# Altium PCB PCB1.PcbDoc (part 1 of 2)
Units mm, origin at the board's own origin, x right, y up, seen from the top; angles counter-clockwise.
Board outline 73.56 x 14.27 mm, 2 copper layers (Top Layer, Bottom Layer); 32 components, 52 nets, 198 pads, 60 vias.
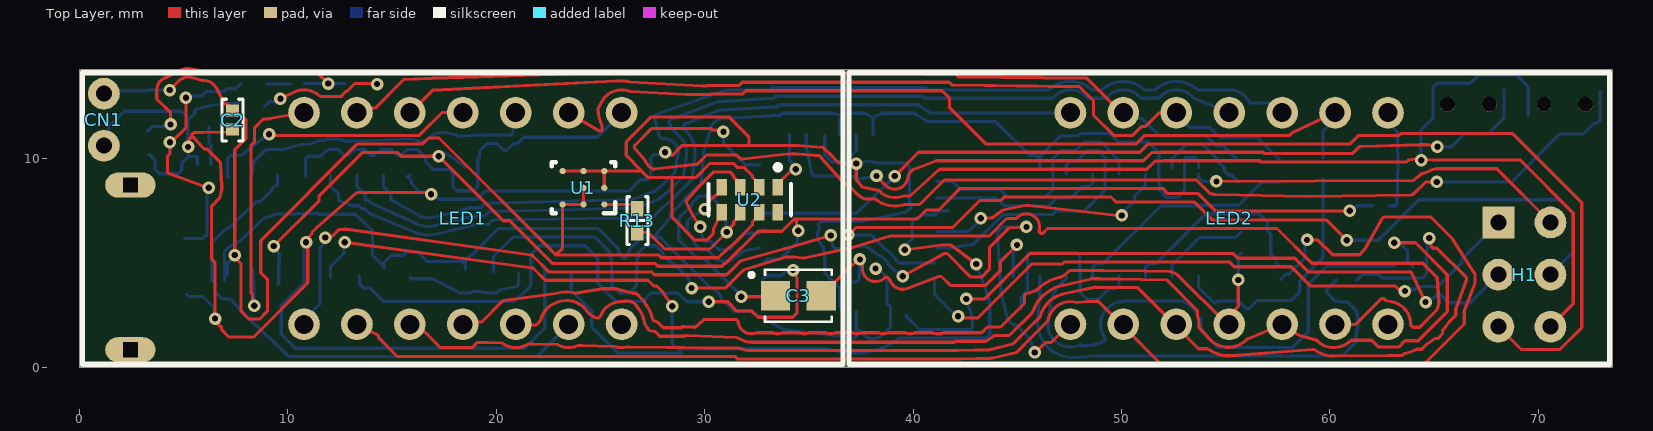
[diagram p0: Top Layer view]
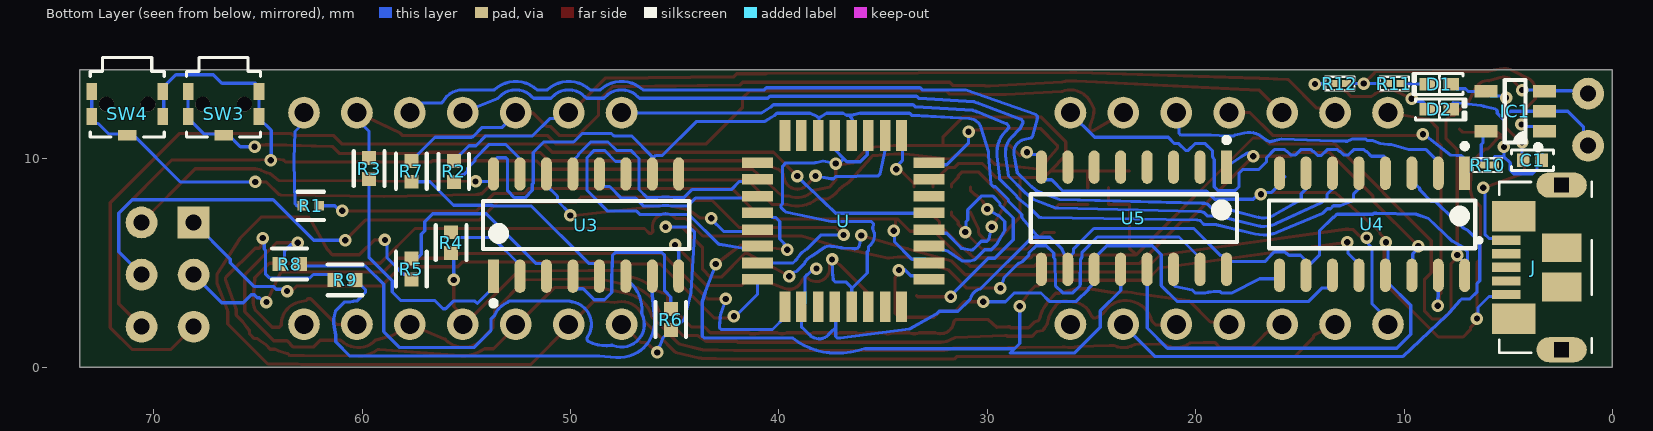
[diagram p1: Bottom Layer view, seen from below]

## Layer stack, top to bottom
Top Solder: solder mask 0.0102, Solder Resist, Dk 3.5
Top Layer: signal copper 0.0356
Dielectric 1: dielectric 0.32, FR-4, Dk 4.8
Bottom Layer: signal copper 0.0356
Bottom Solder: solder mask 0.0102, Solder Resist, Dk 3.5

## Board outline
0,0 73.558,0 73.558,14.275 0,14.275

## Design rules (kind name [scope] priority, off if disabled: settings)
Clearance [All] p1: gap=0.254 ignorepadtopadclearanceinfootprint=FALSE except(0: Arc-Hole Track-Hole SMDPad-Hole THPad-Hole Via-Hole Fill-Hole Poly-Hole Region-Hole Text-Hole; 0.127: SMDPad-Fill SMDPad-Poly SMDPad-Region)
PolygonConnect [All] p1: connectstyle=Relief reliefconductorwidth=0.254 reliefentries=4 polygonreliefangle="90 Angle" airgapwidth=0.254
RoutingVias [All] p1: holewidth=0.711 width=1.27 viastyle="Through Hole" minholewidth=0.711 minwidth=1.27 maxholewidth=0.711 maxwidth=1.27
SolderMaskExpansion [All] p1: expansion=0.102 istentingtop=FALSE
Width [All] p1: maxlimit=0.254 minlimit=0.127 preferedwidth=0.152 minimp=50.000000 maximp=50.000000 favimp=50.000000
30 further rules are at their usual default settings.

## Classes and differential pairs
component class RV-3028: C3 R13 U1 U2
component class Power_Management: C1 C2 CN1 D1 D2 IC1 J R10 R11 R12
component class Segment_Register: R2 R3 R4 R5 R6 R7 R8 R9 U3
component class Multiplex_Registers: R1 U4 U5
component class Micro: H1 SW3 SW4 U
component class LEDs: LED1 LED2

## Components (designator, comment, footprint, x,y, rotation, side; value= is the part's Value field where it differs from the comment)
C1 "10 µF" "CAP 0402_1005" 3.835,9.931 r0 bottom
C2 "10 µF" "CAP 0402_1005" 7.341,11.862 r90 top
C3 "CPX3225A752D" CAPCP3225X100N 34.493,3.429 r0 top
CN1 "JSTPH" LAZY-JST 1.168,13.132 r270 top
D1 "Red" "LED 0402_1005 RED" 8.306,13.589 r0 bottom
D2 "Green" "LED 0402_1005 GREEN" 8.306,12.37 r180 bottom
H1 "ISP Header" "ISP Header" 68.087,1.945 r0 top
IC1 "MCP73831T-5ACI/OT" "MICROCHIP SOT-23-5 OT" 4.667,12.282 r0 bottom
J "105164-0001" MOLEX_105164-0001 0.988,4.788 r90 bottom
LED1 "SLR0365CRA1BD/AFN-3651A" LED-SEG-TH_SLR0365CRA1BD-AFN-3651A 18.39,7.137 r0 top locked
LED2 "SLR0365CRA1BD/AFN-3651A" LED-SEG-TH_SLR0365CRA1BD-AFN-3651A 55.169,7.137 r0 top locked
R1 "CRCW04020000Z0ED" FP-CRCW0402-e3-IPC_C 62.459,7.747 r0 bottom
R2 "CRCW0402150RFKED" FP-CRCW0402-e3-IPC_A 55.601,9.398 r90 bottom
R3 "CRCW0402150RFKED" FP-CRCW0402-e3-IPC_A 59.665,9.531 r90 bottom
R4 "CRCW0402150RFKED" FP-CRCW0402-e3-IPC_A 55.728,5.975 r270 bottom
R5 "CRCW0402150RFKED" FP-CRCW0402-e3-IPC_A 57.633,4.705 r270 bottom
R6 "CRCW0402150RFKED" FP-CRCW0402-e3-IPC_A 45.187,2.286 r270 bottom
R7 "CRCW0402150RFKED" FP-CRCW0402-e3-IPC_A 57.633,9.404 r90 bottom
R8 "CRCW0402150RFKED" FP-CRCW0402-e3-IPC_A 63.475,4.953 r0 bottom
R9 "CRCW0402150RFKED" FP-CRCW0402-e3-IPC_A 60.813,4.191 r0 bottom
R10 "10 kOhms" "RES 0201_0603" 5.994,9.703 r0 bottom
R11 "150 Ohms" "RES 0201_0603" 10.465,13.614 r0 bottom
R12 "150 Ohms" "RES 0201_0603" 13.081,13.614 r0 bottom
R13 "3 kOhms" "RES 0402_1005" 26.772,7.036 r270 top
SW3 "SOU-242HNT" SOU-242HNT_MIT 66.65,12.624 r0 bottom
SW4 "SOU-242HNT" SOU-242HNT_MIT 71.272,12.624 r0 bottom
U "ATMEGA168PA-AU" QFP80P900X900X120-32N 36.911,7.009 r270 bottom
U1 "TPS826951SIPT" SIP0008A 24.181,8.611 r180 top
U2 "RV-3028-C7 32.768kHz 1ppm TA QC" FP-RV-3028-C7_32_768kHz_1-MFG 32.16,8.042 r180 top
U3 "74HC595D,118" FP-SOT109-1-IPC_C 49.251,6.82 r90 bottom
U4 "74HC595D,118" FP-SOT109-1-IPC_C 11.532,6.858 r270 bottom
U5 "74HC595D,118" FP-SOT109-1-IPC_C 22.962,7.15 r270 bottom

## Footprints (in the part's own frame and the unit in brackets; to place one, negate y for a bottom-side part, rotate by r counter-clockwise, add the part's x,y. Pads: shape width x height; smd on the part's side, far side on the other; paste and mask are expansions set on the pad)
"CAP 0402_1005" [mm] "Chip Capacitor, 2-Leads, Body 1.02x0.51mm, IPC Medium Density"
  rect 0.6x0.64 smd: 1(-0.44,0) 2(0.44,0)
  silkscreen extent -1,-0.5 1,0.5, body extent -0.5,-0.26 0.5,0.26, height 0.52
CAPCP3225X100N [mm]
  rect 1.4x1.4 smd: 1(-1.1,0) 2(1.1,0)
  silkscreen extent -2.35,-1.25 1.6,1.25, body extent -1.6,-1.25 1.6,1.25, height 1
FP-CRCW0402-e3-IPC_A [mm]
  rect 0.668x0.672 smd paste+0 mask+0: 1(-0.502,0) 2(0.502,0)
  silkscreen extent -0.84,-0.74 0.84,0.74, body extent -0.5,-0.25 0.5,0.25, height 0.4
FP-CRCW0402-e3-IPC_C [mm]
  rect 0.468x0.472 smd paste+0 mask+0: 1(-0.402,0) 2(0.402,0)
  silkscreen extent -0.64,-0.67 0.64,0.67, body extent -0.5,-0.25 0.5,0.25, height 0.4
FP-RV-3028-C7_32_768kHz_1-MFG [mm]
  rect 0.5x0.8 smd paste+0 mask+0: 1(-1.35,-0.6) 2(-0.45,-0.6) 3(0.45,-0.6) 4(1.35,-0.6) 5(1.35,0.6) 6(0.45,0.6) 7(-0.45,0.6) 8(-1.35,0.6)
  silkscreen extent -1.97,-1.67 1.97,0.75, body extent -1.7,-1.1 1.7,1.1, height 0.25
FP-SOT109-1-IPC_C [mm]
  rect 1.604x0.528 smd paste+0 mask+0: 1(-2.451,4.445)
  rrect100% 1.604x0.528 smd paste+0 mask+0: 2(-2.451,3.175) 3(-2.451,1.905) 4(-2.451,0.635) 5(-2.451,-0.635) 6(-2.451,-1.905) 7(-2.451,-3.175) 8(-2.451,-4.445) 9(2.451,-4.445) 10(2.451,-3.175) 11(2.451,-1.905) 12(2.451,-0.635) 13(2.451,0.635) 14(2.451,1.905) 15(2.451,3.175) 16(2.451,4.445)
  silkscreen extent -3.88,-4.95 1.15,4.95, body extent -3,-4.95 3,4.95, height 1.75
"ISP Header" [mil]
  rect 60x60 hole 30: 1(0,196.85)
  round 60 hole 30: 2(98.43,196.85) 3(0,98.43) 4(98.43,98.43) 5(0,0) 6(98.43,0)
LAZY-JST [mil]
  round 60 hole 30: 1(98.43,0) 2(0,0)
"LED 0402_1005 GREEN" [mm] "Chip Diode, 2-Leads, Body 1.00x0.50mm, IPC Medium Density"
  rect 0.75x0.6 smd: 1(-0.575,0) 2(0.575,0)
  silkscreen extent -1.14,-0.51 1.27,0.51, body extent -0.5,-0.25 0.5,0.25, height 0.21
"LED 0402_1005 RED" [mm] "Chip Diode, 2-Leads, Body 1.00x0.50mm, IPC Medium Density"
  rect 0.75x0.6 smd: 1(-0.575,0) 2(0.575,0)
  silkscreen extent -1.14,-0.51 1.27,0.51, body extent -0.5,-0.25 0.5,0.25, height 0.21
LED-SEG-TH_SLR0365CRA1BD-AFN-3651A [mil]
  round 60 hole 36: 1(-300,-200) 2(-200,-200) 3(-100,-200) 4(0,-200) 5(100,-200) 6(200,-200) 7(300,-200) 8(300,200) 9(200,200) 10(100,200) 11(0,200) 12(-100,200) 13(-200,200) 14(-300,200)
  silkscreen extent -719,-276 719,276
"MICROCHIP SOT-23-5 OT" [mm] "SOT23, 5-Leads, Body 2.90x2.70mm, Pitch 0.95mm, IPC Medium Density"
  rect 1.1x0.6 smd: 1(-1.4,0.95) 2(-1.4,0) 3(-1.4,-0.95) 4(1.4,-0.95) 5(1.4,0.95)
  silkscreen extent -1.22,-1.5 0.5,1.85, body extent -1.36,-1.45 1.36,1.45, height 1.19
MOLEX_105164-0001 [mm]
  rect 0.45x1.38 smd: 1(1.3,4.11) 2(0.65,4.11) 3(0,4.11) 4(-0.65,4.11) 5(-1.3,4.11)
  oval 1.208x2.416 hole 0.7 square: SH1(-3.95,1.45) SH6(3.95,1.45)
  rect 1.475x2.1 smd: SH2(-2.462,3.75) SH5(2.462,3.75)
  rect 1.375x1.9 smd: SH3(-0.937,1.45) SH4(0.937,1.45)
  silkscreen extent -4.1,0 4.1,5.5, body extent -4.1,-0.7 4.1,4.45, height 2.45
QFP80P900X900X120-32N [mil]
  rect 58x20 smd: 1(-162,110) 2(-162,79) 3(-162,47) 4(-162,16) 5(-162,-16) 6(-162,-47) 7(-162,-79) 8(-162,-110) 17(162,-110) 18(162,-79) 19(162,-47) 20(162,-16) 21(162,16) 22(162,47) 23(162,79) 24(162,110)
  rect 20x58 smd: 9(-110,-162) 10(-79,-162) 11(-47,-162) 12(-16,-162) 13(16,-162) 14(47,-162) 15(79,-162) 16(110,-162) 25(110,162) 26(79,162) 27(47,162) 28(16,162) 29(-16,162) 30(-47,162) 31(-79,162) 32(-110,162)
  body extent -177,-177 177,177, height 47
"RES 0201_0603" [mm] "Chip Resistor, 2-Leads, Body 0.60x0.30mm, IPC Medium Density"
  rect 0.44x0.35 smd: 1(-0.325,0) 2(0.325,0)
  silkscreen extent -0.7,-0.33 0.7,0.33, body extent -0.3,-0.15 0.3,0.15, height 0.21
"RES 0402_1005" [mm] "Chip Resistor, 2-Leads, Body 1.0x0.5mm, IPC Medium Density"
  rect 0.75x0.6 smd: 1(-0.575,0) 2(0.575,0)
  silkscreen extent -1.14,-0.51 1.14,0.51, body extent -0.5,-0.25 0.5,0.25, height 0.35
SIP0008A [mm]
  round 0.3 smd paste+0.02 mask+0.051: A1(-1,0.8) A2(0,0.8) A3(1,0.8) B1(-1,0) B2(0,0) C1(-1,-0.8) C2(0,-0.8) C3(1,-0.8)
  silkscreen extent -1.53,-1.22 1.53,1.22, body extent -1.45,-1.15 1.45,1.15, height 0.93
SOU-242HNT_MIT [mil]
  round 28 hole 28 unplated: 6(-39.35,0) 7(39.35,0)
  rect 20x32 smd paste+0 mask+0: A(-66.95,-23.6) B1(66.95,23.6) B2(66.95,-23.6) G(-66.95,23.6)
  rect 35x20 smd: B3(0,59.1)
  silkscreen extent -70,-88 70,62, body extent 0,0 10,10, height 10

## Part data
C1 C2: library part CL05A106MQ5NUNC, "CAP CER 10UF 6.3V X5R 0402", Device Package="0402 (1005 Metric)", manufacturer="Samsung Electro-Mechanics", Operating Temperature="-55°C ~ 85°C", Supplier Part Number 1=1276-1451-1-ND, Temperature Coefficient=X5R, Tolerance=±20%, Voltage - Rated=6.3V, Applications="General Purpose", Capacitance="10 µF", ComponentLink1Description=Datasheet, ComponentLink1URL=http://www.samsungsem.com/kr/support/product-search/mlcc/CL05A106MQ5NUNC.jsp, ComponentLink2Description="DigiKey Link", ComponentLink2URL=https://www.digikey.com/en/products/detail/samsung-electro-mechanics/CL05A106MQ5NUNC/3887109, lastupdated="7/26/2022 2:28:04 AM", Lifecycle Status=Active, Minimum Order=1, Mounting Type="Surface Mount, MLCC", Package / Case="0402 (1005 Metric)", Packaging=TapeAndReel, Part Number=CL05A106MQ5NUNC, Part Status=Active, partid=1766, price=0.03, Series=CL, Size / Dimension="0.039\" L x 0.020\" W (1.00mm x 0.50mm)", Supplier 1=DigiKey, Thickness (Max)="0.028\" (0.70mm)"
C3: "7.5mF (EDLC) Supercapacitor 2.6V 1210 (3225 Metric) 25Ohm @ 1kHz", Package="1210 Seiko", Availability=Good, Check_prices=https://www.snapeda.com/parts/CPX3225A752D/Seiko%20Instruments/view-part/2170187/?ref=eda, MF="Seiko Instruments", MP=CPX3225A752D, price=None, Purchase-URL=https://pricing.snapeda.com/search/part/CPX3225A752D/?ref=eda, SnapEDA_Link=https://www.snapeda.com/parts/CPX3225A752D/Seiko%20Instruments/view-part/2170187/?ref=snap
CN1: library part JST_2PIN, "JST 2-Pin Right-Angle Connector  PH-Series - 4UConnector: 17311  SH-Series - 4UConnector: 07278", DeviceSetName=JST_2PIN, GateName_1=G$1, LibraryName=microbuilder, SymbolName_1=PINHD2
D1: library part APHHS1005SURCK, "LED RED CLEAR CHIP SMD", Current - Test=20mA, Device Package="0402 (1005 Metric)", Lens Color=Colorless, manufacturer=Kingbright, Millicandela Rating=70mcd, Supplier Device Package="Chip LED", Supplier Part Number 1=754-1104-1-ND, Voltage - Forward (Vf) (Typ)=1.95V, Color=Red, ComponentLink1Description=Datasheet, ComponentLink1URL=http://www.kingbrightusa.com/images/catalog/SPEC/APHHS1005SURCK.pdf, ComponentLink2Description="DigiKey Link", ComponentLink2URL=https://www.digikey.com/en/products/detail/kingbright/APHHS1005SURCK/1747502, Configuration=Standard, Height (Max)=0.60mm, lastupdated="7/29/2022 2:39:04 PM", Lens Size="0.80mm x 0.50mm", Lens Style="Rectangle with Flat Top", Lens Transparency=Clear, Lifecycle Status=Active, Minimum Order=1, Mounting Type="Surface Mount", Package / Case="0402 (1005 Metric)", Packaging=TapeAndReel, Part Number=APHHS1005SURCK, Part Status=Active, partid=520, price=0.09, Series=-, Size / Dimension="1.00mm L x 0.50mm W", Supplier 1=DigiKey, Viewing Angle=120°, Wavelength - Dominant=630nm, Wavelength - Peak=645nm
D2: library part APHHS1005CGCK, "LED GREEN CLEAR CHIP SMD", Current - Test=20mA, Device Package="0402 (1005 Metric)", Lens Color=Colorless, manufacturer=Kingbright, Millicandela Rating=50mcd, Supplier Device Package="Chip LED", Supplier Part Number 1=754-1101-1-ND, Voltage - Forward (Vf) (Typ)=2.1V, Color=Green, ComponentLink1Description=Datasheet, ComponentLink1URL=http://www.kingbrightusa.com/images/catalog/SPEC/APHHS1005CGCK.pdf, ComponentLink2Description="DigiKey Link", ComponentLink2URL=https://www.digikey.com/en/products/detail/kingbright/APHHS1005CGCK/1747499, Configuration=Standard, Height (Max)=0.60mm, lastupdated="7/29/2022 2:38:46 PM", Lens Size="0.80mm x 0.50mm", Lens Style="Rectangle with Flat Top", Lens Transparency=Clear, Lifecycle Status=Active, Minimum Order=1, Mounting Type="Surface Mount", Package / Case="0402 (1005 Metric)", Packaging=TapeAndReel, Part Number=APHHS1005CGCK, Part Status=Active, partid=713, price=0.07, Series=-, Size / Dimension="1.00mm L x 0.50mm W", Supplier 1=DigiKey, Viewing Angle=120°, Wavelength - Dominant=570nm, Wavelength - Peak=574nm
IC1: "IC CONTRLR LI-ION 4.50V SOT23-5", Part Number=MCP73831T-5ACI/OT
J: "USB - micro B USB 2.0 Receptacle Connector 5 Position Surface Mount, Right Angle; Through Hole", Package=None, Availability=Unavailable, MF=Molex, MP=1051640001, price=None, SnapEDA_Link=https://www.snapeda.com/parts/1051640001/Molex/view-part/1758198/?ref=snap
LED1 LED2: BOM_JLCPCB Part Class="Extended Part", BOM_Manufacturer=SUNLIGHT, BOM_Manufacturer Part=SLR0365CRA1BD/AFN-3651A, BOM_Supplier=LCSC, BOM_Supplier Part=C225969, Contributor=LCSC, spicePre=L, spiceSymbolName=SLR0365CRA1BD/AFN-3651A
R1: library part CMP-2002-08122-2, "RES Thick Film, 0Ω, 0.063W, 0402", Case Code (Imperial)=0402, Case Code (Metric)=1005, Max Operating Temperature=155°C, Max Power Dissipation=63mW, Min Operating Temperature=-55°C, Package Quantity=1, Resistance=0mR, Temperature Coefficient=100ppm/°C, Tolerance=5%, Voltage Rating=50V, Case/Package=0402, Composition="Thick Film", Contact Plating=Tin, Depth=0.5mm, Features="Automotive AEC-Q200", Height=0.35mm, Lead Free="Lead Free", Length=1mm, Military Standard=Not, Mount="Surface Mount", Number of Terminations=2, Packaging="Tape and Reel", Power Rating=63mW, Radiation Hardening=No, Termination=SMD/SMT, Voltage Rating (DC)=50V, Weight=2.3E-05oz, Width=0.5mm
R2 R3 R4 R5 R6 R7 R8 R9: library part CMP-2002-08214-2, "RES Thick Film, 150Ω, 1%, 0.063W, 100ppm/°C, 0402", Case Code (Imperial)=0402, Case Code (Metric)=1005, Max Operating Temperature=155°C, Min Operating Temperature=-55°C, Package Quantity=10000, Power Rating=63mW, Resistance=150R, Temperature Coefficient=100ppm/°C, Tolerance=1%, Voltage Rating=50V, Case/Package=0402, Composition="Thick Film", Contact Plating=Tin, Depth=0.5mm, Height=0.35mm, Lead Free="Lead Free", Length=1mm, Military Standard=Not, Mount="Surface Mount", Packaging="Tape and Reel", Radiation Hardening=No, Termination=SMD/SMT, Voltage Rating (DC)=50V, Weight=2.3E-05oz, Width=0.5mm
R10: library part RC0201FR-0710KL, "RES 10K OHM 1% 1/20W 0201", Device Package="0201 (0603 Metric)", manufacturer=Yageo, Operating Temperature="-55°C ~ 125°C", Power (Watts)="0.05W, 1/20W", Supplier Device Package=0201, Supplier Part Number 1=311-10.0KMCT-ND, Temperature Coefficient=±200ppm/°C, Tolerance=±1%, ComponentLink1Description=Datasheet, ComponentLink1URL=https://www.yageo.com/upload/media/product/productsearch/datasheet/rchip/PYu-RC_Group_51_RoHS_L_10.pdf, ComponentLink2Description="DigiKey Link", ComponentLink2URL=https://www.digikey.com/en/products/detail/yageo/RC0201FR-0710KL/1948870, Composition="Thick Film", Features="Moisture Resistant", Height - Seated (Max)="0.010\" (0.26mm)", lastupdated="8/4/2022 4:39:11 AM", Lifecycle Status=Active, Minimum Order=1, Number of Terminations=2, Package / Case="0201 (0603 Metric)", Packaging=CutTape, Part Number=RC0201FR-0710KL, Part Status=Active, partid=2281, price=0.01, Resistance="10 kOhms", Series=RC_L, Size / Dimension="0.024\" L x 0.012\" W (0.60mm x 0.30mm)", Supplier 1=DigiKey
R11 R12: library part RC0201FR-07150RL, "RES 150 OHM 1% 1/20W 0201", Device Package="0201 (0603 Metric)", manufacturer=Yageo, Operating Temperature="-55°C ~ 125°C", Power (Watts)="0.05W, 1/20W", Supplier Device Package=0201, Supplier Part Number 1=YAG2273CT-ND, Temperature Coefficient=±200ppm/°C, Tolerance=±1%, ComponentLink1Description=Datasheet, ComponentLink1URL=https://www.yageo.com/upload/media/product/productsearch/datasheet/rchip/PYu-RC_Group_51_RoHS_L_10.pdf, ComponentLink2Description="DigiKey Link", ComponentLink2URL=https://www.digikey.com/en/products/detail/yageo/RC0201FR-07150RL/3202385, Composition="Thick Film", Features="Moisture Resistant", Height - Seated (Max)="0.010\" (0.26mm)", lastupdated="8/4/2022 4:39:17 AM", Lifecycle Status=Active, Minimum Order=1, Number of Terminations=2, Package / Case="0201 (0603 Metric)", Packaging=CutTape, Part Number=RC0201FR-07150RL, Part Status=Active, partid=1399, price=0.01, Resistance="150 Ohms", Series=RC_L, Size / Dimension="0.024\" L x 0.012\" W (0.60mm x 0.30mm)", Supplier 1=DigiKey
R13: library part RC0402FR-073KL, "RES 3K OHM 1% 1/16W 0402", Device Package="0402 (1005 Metric)", manufacturer=Yageo, Operating Temperature="-55°C ~ 155°C", Power (Watts)="0.063W, 1/16W", Supplier Device Package=0402, Supplier Part Number 1=311-3KLRCT-ND, Temperature Coefficient=±100ppm/°C, Tolerance=±1%, ComponentLink1Description=Datasheet, ComponentLink1URL=https://www.yageo.com/upload/media/product/productsearch/datasheet/rchip/PYu-RC_Group_51_RoHS_L_10.pdf, ComponentLink2Description="DigiKey Link", ComponentLink2URL=https://www.digikey.com/en/products/detail/yageo/RC0402FR-073KL/2827586, Composition="Thick Film", Features="Moisture Resistant", Height - Seated (Max)="0.016\" (0.40mm)", lastupdated="8/4/2022 4:45:37 AM", Lifecycle Status=Active, Minimum Order=1, Number of Terminations=2, Package / Case="0402 (1005 Metric)", Packaging=CutTape, Part Number=RC0402FR-073KL, Part Status=Active, partid=2489, price=0.01, Resistance="3 kOhms", Series=RC_L, Size / Dimension="0.039\" L x 0.020\" W (1.00mm x 0.50mm)", Supplier 1=DigiKey
SW3 SW4: "SWITCH TACTILE, SPST-NO, 0.05A 1", Mfr_Name=Mitsumi, Copyright="Copyright (C) 2022 Ultra Librarian. All rights reserved.", Digi-Key_Part_Number_1=12-SOU-242HNTTR-ND, Digi-Key_Part_Number_2=12-SOU-242HNTCT-ND, Digi-Key_Part_Number_3=12-SOU-242HNTDKR-ND, Manufacturer_Part_Number=SOU-242HNT, RefDes=RefDes, Supplier 1=Digi-Key, Supplier 2=Digi-Key, Supplier 3=Digi-Key, Type=DEV
U: "AVR AVRÂ® ATmega Microcontroller IC 8-Bit 20MHz 16KB _8K x 16_ FLASH 32-TQFP _7x7_", Package="TQFP-32 Microchip", Availability=Unavailable, MF=Microchip, MP=ATMEGA168PA-AU, price=None, SnapEDA_Link=https://www.snapeda.com/parts/ATMEGA168PA-AU/Microchip/view-part/1772950/?ref=snap
U1: "No Description Available", Mfr_Name="Texas Instruments", Copyright="Copyright (C) 2022 Ultra Librarian. All rights reserved.", Digi-Key_Part_Number_1=2156-TPS826951SIPT-ND, Digi-Key_Part_Number_2=296-TPS826951SIPTCT-ND, Digi-Key_Part_Number_3=296-TPS826951SIPTDKR-ND, Digi-Key_Part_Number_4=296-TPS826951SIPTTR-ND, Digi-Key_Part_Number_5=TPS826951SIPT-ND, Manufacturer_Part_Number=TPS826951SIPT, RefDes=RefDes, Type=DEV
U2: library part CMP-226158-000001-1, "Real Time Clock Serial 2byte Clock/Calendar/Alarm/Timer/Battery Backup 8-Pin CSMD T/R", Ambient Temperature Range High=+85°C, Ambient Temperature Range Low=-40°C, Frequency=32.768kHz, manufacturer="Micro Crystal", Max Supply Voltage=5.5V, Min Supply Voltage=1.1V, Nominal Supply Current=0.04uA, Temperature="-40°C to +85°C", Automotive=No, Category=IC, ComponentLink2Description=Datasheet, ComponentLink2URL=https://www.microcrystal.com/fileadmin/Media/Products/RTC/Datasheet/RV-3028-C7.pdf, Device Class L1="Integrated Circuits (ICs)", Device Class L2="Clock and Timing", Device Class L3="Real Time Clocks", Height=0.8mm, Interface=I2C, Lead Free=Yes, Manufacturer Part Number="RV-3028-C7 32.768kHz 1ppm TA QC", Memory Size=2Bytes, Mouser Description="RV-3028-C7 32.768KHZ 1PPM Ta Qc", Number Of Outputs=1, Octopart=https://octopart.com/rv-3028-c7+32.768khz+1ppm+ta+qc-micro+crystal-98880451, Package="RV-3028-C7 32.768kHz 1ppm TA QC", RoHS=TRUE, Temperature Range High=+85°C, Temperature Range Low=-40°C
U3 U4 U5: library part CMP-14351-000006-1, "IC SHIFT REGISTER 8BIT 16SOIC", RoHS Compliant=Yes

## Via types
v1: diameter 0.6, hole 0.3, Top Layer to Bottom Layer, 60 vias

## Nets (pads, with @x,y where several pads share a name; then routed paths per layer and width w, separated by ;. In a path a pad name is that pad's centre, name@x,y a point inside that pad or via, vN(x,y) a via of type N, cw(c..) or ccw(c..) an arc to the next point about the centre after c; other vN are vias at no path point)
GND: C1.1 C2.1 C3.2 CN1.1 D2.2 H1.6 IC1.2 J.5 R10.1 SW3.A SW3.G SW4.A SW4.G U1.B1 U1.C1 U1.C2 U1.C3 U2.2 U2.5 U3.8 U4.8 U4.13 U5.8 U5.13 U.3 U.5 U.21 | length 200.4
  Top Layer w0.152: v1(5.207,10.573) 5.25,10.94 5.407,11.096 5.407,11.103 ; 5.366,11.165 5.496,11.251 5.539,11.252 5.919,11.263 7.214,11.295 C2.1 ; 5.407,11.031 5.46,11.031 5.549,10.941 5.884,10.568 5.973,10.479 6.107,10.479 6.755,9.831 6.827,8.649 cw(c6.198,8.611) 6.805,8.442 6.71,8.102 6.335,7.727 6.335,5.176 6.502,5.008 v1(6.502,2.337) 6.502,2.216 6.816,1.903 6.816,1.795 7.163,1.448 8.349,1.448 10.953,4.052 10.953,5.912 v1(10.871,5.994) 10.871,6.116 11.155,6.4 11.155,6.484 11.371,6.699 11.373,6.699 13.264,8.345 13.307,8.382 16.789,8.382 v1(16.866,8.306) ; U1.C3 U1.C2 U1.C1 ; U1.B1 U1.C1 ; v1(28.094,10.31) 28.402,10.175 28.434,10.175 28.451,10.175 28.922,10.647 34.454,10.647 34.506,10.633 35.677,10.552 35.718,10.511 36.043,10.187 36.335,9.894 36.425,9.804 37.102,9.696 37.191,9.696 37.194,9.693 v1(37.275,9.774) ; U2.5 30.653,7.118 30.426,6.65 cw(c29.158,6.684) 30.424,6.62 cw(c29.158,6.684) 30.391,6.388 30.103,6.1 29.53,6.1 28.436,7.194 28.436,9.098 ; 32.131,10.668 32.131,11.042 31.158,12.015 27.432,12.015 26.23,10.812 26.23,10.165 26.984,9.411 ; U2.2 32.61,8.792 32.29,9.112 32.29,9.179 31.88,9.589 31.555,9.589 31.365,9.779 30.255,9.779 29.574,9.098 28.436,9.098 ; C3.2 36.965,4.801 37.054,4.89 v1@37.457,5.164 ; v1@37.275,9.612 37.275,8.999 37.559,8.646 38.301,8.49 38.348,8.48 ccw(c39.119,9.173) 39.52,8.217 39.852,8.217 41.267,9.5 51.215,9.5 51.565,9.85 51.608,9.893 51.668,9.895 52.03,9.906 52.035,9.906 56.626,9.906 56.677,9.855 63.684,9.855 63.727,9.898 63.76,9.931 63.806,9.94 64.221,10.019 64.301,10.019 v1(64.389,9.931) ; v1(37.447,5.171) 37.447,5.167 v1@37.453,5.161 ; v1@37.486,5.147 37.571,5.062 37.571,4.89 37.567,4.756 ccw(c38.197,4.737) 38.642,4.291 38.652,4.3 38.778,4.3 38.867,4.211 38.941,4.073 ccw(c39.497,4.369) 39.72,3.779 41.236,4.354 41.362,4.354 41.799,3.916 43.457,3.916 44.177,4.637 44.177,5.061 v1(44.983,5.867) ; v1@64.544,9.961 64.901,9.951 64.994,9.951 69.125,9.951 71.679,7.397 71.679,3.037 H1.6 ; U1.C1 26.984,9.411 ; 26.984,9.411 27.297,9.098 28.436,9.098
  Bottom Layer w0.152: CN1.1 1.381,10.844 1.381,11.515 2.148,12.282 IC1.2 4.893,12.282 4.937,12.243 5.122,12.075 5.208,11.887 5.187,11.866 5.187,10.78 5.197,10.77 5.207,10.77 v1(5.207,10.573) 5.207,10.116 ; C1.1@3.345,10.211 3.619,9.936 3.619,9.501 3.839,9.281 4.736,9.281 4.855,9.4 4.855,9.424 4.906,9.475 4.906,9.805 5.207,10.106 5.207,10.116 ; J.5@5.142,3.48 5.229,3.393 5.925,3.393 6.453,2.865 6.453,2.386 v1(6.502,2.337) ; 5.253,11.908 5.524,12.178 5.524,12.301 5.584,12.362 5.613,12.391 6.125,12.509 ccw(c5.983,13.123) 6.177,12.523 6.296,12.562 7.361,12.68 7.655,12.7 ; R10.1 5.644,9.728 5.644,10.109 5.214,10.109 5.207,10.116 ; v1@10.77,5.728 10.77,4.064 9.677,2.972 9.677,1.58 10.343,0.914 21.357,0.914 22.327,1.884 U5.13 ; U4.8@15.85,9.22 15.774,9.144 15.725,9.144 15.93,8.939 15.93,8.817 16.356,8.391 16.78,8.391 v1(16.866,8.306) 16.987,8.306 17.231,8.062 19.086,8.062 19.476,8.452 26.366,8.452 26.914,9 27.233,9 27.407,9.173 U5.8 27.407,10.037 27.58,10.211 v1@27.874,10.211 ; U.3@35.76,11.081 35.76,10.188 36.087,9.862 36.736,9.862 36.88,10.007 ; U.21 36.505,3.78 35.762,4.522 35.762,5.545 35.694,5.613 35.694,5.759 35.691,5.79 35.65,5.83 ccw(c35.542,5.723) 35.649,5.832 35.644,5.836 cw(c36.043,6.325) 35.499,6.644 35.499,6.683 35.499,6.708 35.465,6.807 35.465,6.896 35.51,6.94 35.555,6.985 35.618,6.985 37.506,6.985 39.685,7.452 39.774,7.542 39.891,7.658 39.891,7.785 39.819,7.856 39.819,9.652 39.669,9.803 38.474,9.803 cw(c38.447,11.637) 37.879,9.893 v1(37.275,9.774) ; 36.505,3.815 36.786,4.096 37.236,4.096 37.3,4.096 37.355,4.151 37.389,4.185 37.433,4.559 37.433,4.566 v1(37.447,5.171) ; v1@37.23,9.657 36.88,10.007 ; U.5@37.275,11.167 37.275,10.401 36.88,10.007 ; U3.8 44.806,5.568 44.983,5.746 v1(44.983,5.867) ; v1(64.389,9.931) 64.364,9.957 64.364,11.363 64.949,11.948 SW3.G SW3.A 64.949,13.452 65.127,13.63 66.731,13.63 67.137,14.036 68.937,14.036 69.521,13.452 SW4.G@69.521,12.101
NetC3_1: C3.1 R13.2 U2.6 | length 17.1
  Top Layer w0.152: R13.2 27.3,6.461 28.087,5.674 30.252,5.674 31.044,6.466 31.087,6.555 31.39,6.859 31.39,6.972 31.71,7.292 U2.6 ; v1(31.75,3.378) 33.342,3.378 C3.1
  Bottom Layer w0.152: v1(31.053,6.485) 31.013,6.524 31.013,6.994 30.937,7.07 30.937,7.55 30.267,8.22 29.745,8.22 29.388,7.863 29.388,7.772 29.294,7.679 29.273,7.679 28.754,7.159 28.754,6.117 29.642,5.23 29.949,5.23 31.75,3.429 v1(31.75,3.378)
NetD1_2: D1.2 R11.1 | length 1.2
  Bottom Layer w0.152: D1.2@8.982,13.589 R11.1@10.14,13.589
NetD2_1: D2.1 R12.2 | length 6.9
  Top Layer w0.152: v1(9.636,12.886) 10.272,13.19 cw(c10.77,12.217) 11.378,13.125 11.587,12.984 11.65,12.984 12.532,12.984 12.786,13.238 12.834,13.238 13.21,13.614 14.249,13.614 v1(14.275,13.589)
  Bottom Layer w0.152: D2.1@8.881,12.522 9.105,12.746 9.375,12.746 9.515,12.886 v1(9.636,12.886) ; R12.2 13.419,13.602 14.262,13.602 v1(14.275,13.589)
NetH1_1: H1.1 U.16 | length 31.1
  Top Layer w0.152: v1(42.155,2.44) 42.233,2.362 43.104,2.362 45.695,4.953 47.169,4.953 47.271,5.055 55.178,5.055 55.249,4.984 55.412,4.821 58.145,4.821 59.076,3.891 63.148,3.891 v1@63.352,3.687
  Bottom Layer w0.152: U.16 41.026,3.494 42.08,2.44 v1(42.155,2.44) ; v1(63.602,3.656) 63.687,3.742 64.12,3.742 64.258,3.88 65.196,3.88 66.327,5.011 66.327,5.185 H1.1
NetH1_3: H1.3 U.17 | length 33.5
  Top Layer w0.152: v1(42.545,3.277) 43.443,3.277 45.628,5.461 55.347,5.461 55.58,5.228 58.314,5.228 58.969,4.572 63.856,4.572 63.945,4.483 v1(64.592,3.124)
  Bottom Layer w0.152: U.17@39.675,2.493 39.675,2.443 40.307,1.81 42.703,1.81 42.766,1.81 42.855,1.899 42.855,1.975 42.817,2.416 ccw(c42.189,2.362) 42.749,2.653 v1(42.545,3.277) ; v1(64.592,3.124) 64.713,3.124 64.925,3.336 65.031,3.336 65.169,3.474 65.322,3.474 65.703,3.093 66.734,3.093 H1.3
NetH1_4: H1.4 U.15 | length 45.6
  Top Layer w0.152: v1(36.896,6.35) 37.27,6.706 41.91,6.706 43.205,8.001 44.198,8.001 44.371,8.174 49.49,8.174 49.496,8.168 49.739,7.925 53.507,7.925 54.371,7.061 59.843,7.061 v1(60.808,6.096)
  Bottom Layer w0.152: v1(36.896,6.35) 37.973,6.35 38.018,6.305 38.641,5.682 38.75,5.613 cw(c38.197,4.737) 39.073,5.29 39.142,5.181 39.32,5.003 U.15 ; v1(60.808,6.096) 62.329,6.096 64.271,8.037 71.039,8.037 71.679,7.397 71.679,5.537 H1.4
NetH1_5: H1.5 U.29 | length 53.2
  Top Layer w0.152: v1(39.119,9.173) 40.259,10.312 50.878,10.312 51.284,10.719 60.979,10.719 61.385,11.125 63.313,11.125 63.4,11.212 68.773,11.212 72.085,7.899 72.085,1.899 71.039,0.853 69.179,0.853 H1.5
  Bottom Layer w0.152: U.29@32.699,7.391 37.275,7.391 38.677,8.724 ccw(c38.243,9.181) 38.692,8.739 v1(39.119,9.173)
NetIC1_1: IC1.1 R11.2 R12.1 | length 14.1
  Top Layer w0.152: v1(4.367,11.652) 4.369,11.654 4.369,12.205 3.702,12.872 3.702,13.303 cw(c4.332,13.301) 4.047,13.863 4.748,14.22 cw(c5.218,13.296) 5.419,14.313 5.96,14.206 11.393,14.159 11.438,14.115 v1(11.938,13.614)
  Bottom Layer w0.152: IC1.1 3.491,11.556 4.15,11.556 4.246,11.652 v1(4.367,11.652) ; R11.2@10.764,13.64 10.934,13.614 v1(11.938,13.614) R12.1
NetIC1_5: IC1.5 R10.2 | length 1.9
  Bottom Layer w0.152: IC1.5@6.209,11.555 6.209,10.77 6.294,10.685 6.294,9.728 R10.2
NetLED1_1: LED1.1 LED2.1 R6.2 | length 52.7
  Top Layer w0.152: v1@11.919,6.09 12.384,6.555 12.429,6.599 12.666,6.622 cw(c12.725,5.994) 12.729,6.625 cw(c12.725,5.994) 12.813,6.619 21.673,5.378 21.724,5.371 21.76,5.335 22.518,4.577 27.445,4.577 27.582,4.44 31.049,4.44 31.702,5.093 33.804,5.681 cw(c34.083,4.683) 33.885,5.7 v1(36.043,6.325) ; v1(39.497,4.369) 41.502,5.461 41.628,5.461 42.767,4.323 43.289,4.323 43.658,4.692 43.658,5.737 44.607,6.686 v1(45.441,6.731) ; v1(45.842,0.708) 46.201,1.026 46.29,1.115 46.359,1.184 46.624,1.184 LED2.1@47.473,2.032
  Bottom Layer w0.152: LED1.1@10.77,2.032 10.77,2.27 11.532,3.032 11.532,5.719 11.7,5.888 11.7,6.137 v1(11.786,6.223) ; v1(36.043,6.325) 36.159,5.778 36.214,5.723 36.244,5.692 36.35,5.686 36.359,5.686 36.37,5.686 cw(c36.464,5.063) 36.485,5.693 36.937,5.721 ccw(c36.896,6.35) 37.011,5.73 37.331,5.79 cw(c37.447,5.171) 37.373,5.796 cw(c37.447,5.171) 37.39,5.798 37.494,5.808 cw(c37.567,5.182) 37.795,5.769 38.409,5.335 38.477,5.301 cw(c38.197,4.737) 38.784,4.964 38.806,4.942 39.152,4.596 39.271,4.56 v1(39.497,4.369) ; v1(45.441,6.731) 44.298,6.731 44.088,6.522 44.044,6.477 44.044,6.351 44.211,3.585 44.52,2.317 44.796,2.042 44.859,2.042 44.929,2.042 R6.2 45.189,1.784 45.473,1.499 45.562,1.41 45.713,1.038 45.756,0.995 45.756,0.794 v1(45.842,0.708)
NetLED1_2: LED1.2 LED2.2 R5.2 | length 72.7
  Top Layer w0.152: LED1.2@13.31,2.032 14.264,1.577 14.351,1.491 14.351,1.411 15.254,0.508 31.471,0.508 31.59,0.389 42.285,0.389 43.718,0.433 43.842,0.438 44.954,0.711 44.991,0.748 45.718,1.476 46.436,2.194 46.47,2.228 cw(c47.549,2.057) 47.731,3.134 47.894,3.107 cw(c48.88,-5.198) 48.816,3.165 48.88,3.165 48.924,3.12 50.038,2.007 51.918,0.127 62.935,0.127 63.077,0.15 63.102,0.152 64.522,0.152 66.446,2.076 66.446,2.673 66.457,2.727 66.963,4.039 66.963,4.462 65.862,6.182 64.83,7.214 62.592,7.214 62.503,7.124 61.657,5.637 61.632,5.604 61.426,5.398 60.202,5.398 60.141,5.398 60.097,5.44 59.387,6.119 v1(58.903,6.108)
  Bottom Layer w0.152: R5.2 57.89,4.461 58.023,4.461 58.807,5.244 58.807,6.012 v1(58.903,6.108)
NetLED1_3: LED1.3 LED2.3 R9.2 | length 64.2
  Top Layer w0.152: LED1.3@15.85,2.032 16.497,1.748 16.704,1.556 16.793,1.467 17.32,0.94 18.842,0.94 19.091,1.189 19.62,1.189 19.625,1.189 20.26,1.169 20.261,1.168 ccw(c20.93,2.032) 21.53,1.12 21.787,1.12 22.892,1.084 22.928,1.083 ccw(c23.47,2.032) 23.937,1.045 24.134,1.045 25.643,0.997 25.663,0.996 25.665,0.996 ccw(c26.01,2.032) 26.275,0.973 26.391,0.973 31.639,0.914 31.78,0.868 ccw(c32.233,2.238) 31.902,0.833 32.064,0.795 42.146,0.795 42.151,0.795 43.668,0.84 44.785,1.118 44.822,1.155 45.55,1.882 46.023,2.356 46.068,2.401 46.097,2.429 cw(c47.549,2.057) 47.277,3.531 48.721,3.835 48.785,3.835 50.775,3.81 52.553,2.032 53.696,0.889 54.123,0.889 54.265,0.799 ccw(c55.129,2.159) 55.253,0.552 59.18,0.856 cw(c59.192,0.704) 59.192,0.856 59.243,0.856 ccw(c60.173,2.032) 60.185,0.533 62.796,0.559 62.797,0.559 63.465,0.559 63.554,0.648 ccw(c62.767,4.081) 64.201,0.864 64.405,0.864 64.638,1.097 ccw(c62.767,4.081) 65.018,1.372 65.167,1.372 65.405,1.61 65.405,1.747 ccw(c62.767,4.081) 65.751,2.209 66.04,2.499 66.04,2.78 ccw(c62.767,4.081) 66.079,2.883 ccw(c62.767,4.081) 66.08,2.885 66.557,4.203 66.557,4.293 66.512,4.338 65.137,5.713 64.945,5.713 64.855,5.802 64.855,6.115 v1(64.77,6.2)
  Bottom Layer w0.152: R9.2 61.316,4.193 61.573,4.451 62.337,4.451 62.502,4.287 64.448,4.287 64.641,4.48 64.641,5.619 64.694,5.672 64.694,6.124 v1(64.77,6.2)
NetLED1_4: LED1.4 LED2.4 R4.2 | length 44.8
  Top Layer w0.152: LED1.4@18.39,2.032 18.529,2.171 19.291,2.171 20.306,3.186 22.843,3.531 cw(c23.368,1.9) 23.275,3.61 cw(c23.362,2.003) 23.798,3.553 25.096,3.764 25.728,3.764 26.508,3.554 26.548,3.549 26.711,3.549 27.04,3.22 27.077,3.183 27.101,3.124 27.206,2.972 cw(c25.58,1.85) 27.358,2.711 cw(c26.01,2.057) 27.456,2.449 cw(c26.01,2.057) 27.457,2.447 27.495,2.307 27.535,2.259 27.541,2.254 cw(c24.199,-2.409) 27.59,2.218 27.667,2.189 27.72,2.169 27.752,2.158 27.776,2.134 28.015,1.895 28.873,1.895 28.876,1.898 28.921,1.942 28.99,1.942 29.546,1.919 29.947,2.286 31.514,2.286 31.603,2.197 31.607,2.163 ccw(c32.233,2.238) 32.377,1.625 32.489,1.651 33.273,1.651 ccw(c33.503,2.238) 33.732,1.651 34.543,1.651 ccw(c34.773,2.238) 35.002,1.651 35.813,1.651 ccw(c36.043,2.238) 36.272,1.651 37.083,1.651 ccw(c37.313,2.238) 37.542,1.651 38.353,1.651 ccw(c38.583,2.238) 38.812,1.651 39.623,1.651 ccw(c39.853,2.238) 40.082,1.651 40.893,1.651 ccw(c41.123,2.238) 41.123,1.608 41.384,1.608 41.428,1.652 43.285,1.652 43.563,1.93 44.196,1.93 45.344,3.079 45.344,3.497 ccw(c43.818,9.037) 45.876,3.671 ccw(c45.821,3.813) 45.927,3.704 cw(c47.549,2.057) 47.081,4.321 ccw(c47.049,4.47) 47.136,4.345 ccw(c43.818,9.037) 47.528,4.648 49.121,4.648 51.113,4.623 52.34,4.597 52.37,4.584 52.68,4.445 55.093,2.032 55.093,2.403 55.601,2.911 v1(55.601,4.191)
  Bottom Layer w0.152: v1(55.601,4.191) 55.601,5.346 R4.2
NetLED1_5: LED1.5 LED2.5 R8.2 | length 57.8
  Top Layer w0.152: LED1.5@20.93,2.032 21.925,2.032 22.097,2.204 22.158,2.392 ; 22.158,2.393 22.16,2.398 cw(c23.368,1.9) 23.296,3.205 cw(c23.362,2.003) 24.159,2.904 ; 24.163,2.901 cw(c23.47,2.057) 24.368,2.678 ; 24.369,2.677 ccw(c25.012,3.122) 24.813,2.366 ccw(c24.852,2.514) 24.993,2.457 cw(c26.01,2.057) 26.07,3.148 ccw(c26.077,3.3) 26.117,3.153 cw(c26.278,2.58) 26.264,3.175 cw(c26.277,2.612) 26.777,2.87 ccw(c26.912,2.94) 26.794,2.844 cw(c25.58,1.85) 26.993,2.533 cw(c26.01,2.057) 27.087,2.234 27.104,2.134 27.123,2.08 27.265,1.866 cw(c25.995,1.855) 27.265,1.841 27.309,1.797 27.354,1.758 27.591,1.708 27.636,1.699 27.668,1.667 27.846,1.489 28.979,1.489 29.042,1.489 29.083,1.527 29.15,1.527 31.538,1.419 31.793,1.299 ccw(c32.233,2.238) 32.233,1.201 40.954,1.201 41.978,1.201 42.023,1.246 43.453,1.246 43.5,1.246 43.539,1.272 43.913,1.524 44.617,1.524 44.662,1.569 45.711,2.618 45.736,2.643 cw(c47.549,2.057) 47.186,3.928 ccw(c47.11,4.327) 47.201,3.931 48.552,4.242 48.953,4.242 50.945,4.216 52.172,4.191 53.645,2.718 53.645,2.486 53.645,2.458 cw(c52.629,2.057) 53.718,1.982 53.718,1.977 ; 53.718,1.977 53.718,1.918 53.758,1.874 54.239,1.348 ccw(c55.129,2.159) 56,1.326 cw(c56.108,1.219) 56.048,1.359 57.633,2.032 57.681,2.006 58.556,1.529 59.366,1.295 ccw(c60.173,2.032) 60.551,1.008 60.564,1.012 ccw(c60.249,2.057) 61.021,1.285 61.031,1.295 62.006,1.295 62.336,0.965 63.297,0.965 63.602,1.27 64.237,1.27 65.634,2.667 65.634,4.445 64.11,5.969 v1(63.094,5.969)
  Bottom Layer w0.152: v1(63.094,5.969) 63.179,5.883 63.433,5.883 63.719,5.598 63.719,5.084 R8.2@63.977,4.826
NetLED1_6: LED1.6 U4.3 | length 26.1
  Bottom Layer w0.152: U4.3@9.5,9.22 9.5,8.745 9.453,8.699 9.363,8.699 9.246,8.581 9.246,8.509 8.687,7.951 8.686,7.95 8.492,7.95 8.439,7.897 8.433,7.897 8.255,7.719 7.194,6.708 6.956,6.571 6.934,6.559 6.901,6.533 6.365,5.998 6.365,4.15 6.492,4.023 6.492,3.623 6.84,3.275 7.241,3.275 7.33,3.185 7.803,2.637 ccw(c8.28,3.048) 7.843,2.595 7.937,2.5 ccw(c8.382,2.946) 7.95,2.487 10.069,0.508 10.071,0.508 21.946,0.508 LED1.6@23.47,2.032
NetLED1_8: LED1.8 U4.4 | length 20.9
  Bottom Layer w0.152: U4.4@10.841,9.145 10.841,9.996 10.972,10.126 11.567,10.126 11.793,10.352 11.831,10.352 11.92,10.441 12.413,10.441 12.665,10.189 12.901,10.189 13.063,10.352 13.101,10.352 13.19,10.441 13.683,10.441 13.964,10.16 14.141,10.16 14.333,10.352 14.371,10.352 14.46,10.441 14.953,10.441 15.205,10.189 15.441,10.189 15.603,10.352 15.641,10.352 15.73,10.441 16.223,10.441 16.603,10.061 16.603,9.86 16.972,9.49 17.739,9.49 17.922,9.307 17.922,8.662 17.966,8.619 18.116,8.468 18.917,8.468 19.111,8.662 19.111,9.961 19.192,10.105 19.192,10.385 19.54,10.733 20.033,10.733 20.358,10.407 20.485,10.407 20.81,10.733 21.013,10.733 21.312,11.032 24.85,11.032 LED1.8@26.01,12.192
NetLED1_9: LED1.9 LED2.9 R3.2 | length 42.9
  Top Layer w0.152: LED1.9@23.47,12.192 24.903,11.362 ccw(c24.979,11.494) 25.061,11.366 25.077,11.455 25.077,11.582 24.995,11.788 cw(c26.484,12.381) 24.881,12.384 ccw(c24.729,12.385) 24.881,12.39 24.881,12.402 25.033,12.706 cw(c26.01,12.217) 26.014,13.31 cw(c26.01,12.217) 26.402,13.237 26.425,13.235 29.097,13.081 30.261,13.081 30.286,13.106 31.81,13.106 31.972,13.268 41.384,13.268 41.753,12.899 41.753,12.446 43.48,10.719 50.71,10.719 51.116,11.125 58.072,11.125 58.177,11.231 LED2.9
  Bottom Layer w0.152: R3.2 59.665,11.313 60.173,11.821 LED2.9@60.173,12.192
NetLED1_10: LED1.10 U4.2 | length 15
  Bottom Layer w0.152: U4.2@8.23,8.925 8.357,9.847 8.357,9.858 8.94,10.441 9.743,10.441 9.786,10.448 10.62,10.693 10.77,10.693 ccw(c10.77,12.192) 11.502,10.884 11.773,10.884 11.836,10.947 12.475,10.947 12.708,10.845 12.803,10.845 14.034,10.872 15.887,10.947 16.447,10.817 ccw(c15.85,12.192) 16.814,11.045 16.816,11.047 cw(c17.437,10.308) 17.669,11.245 18.089,11.141 18.13,11.131 18.16,11.101 18.161,11.1 18.438,11.1 18.456,11.102 19.268,11.14 19.372,11.14 20.709,11.14 20.798,11.229 20.798,12.061 LED1.10@20.93,12.192
NetLED1_11: LED1.11 U4.1 | length 12.9
  Top Layer w0.152: v1(9.093,11.176) 9.144,11.125 16.302,11.125 17.394,12.217 LED1.11
  Bottom Layer w0.152: U4.1@7.105,9.098 7.105,10.024 7.194,10.113 7.239,10.147 7.757,10.177 v1@8.927,11.089
NetLED1_12: LED1.12 LED2.12 R7.2 | length 45.2
  Top Layer w0.152: LED1.12@15.85,12.192 16.946,13.289 25.717,13.74 cw(c25.785,12.43) 25.833,13.741 25.942,13.74 cw(c26.01,12.243) 26.399,13.69 29.881,13.487 30.093,13.487 30.118,13.513 31.641,13.513 31.803,13.675 41.733,13.675 41.87,13.538 47.984,13.459 48.654,12.789 48.654,12.096 49.624,11.125 50.541,11.125 50.973,11.557 51.156,11.557 51.791,12.192 LED2.12@52.553,12.192
  Bottom Layer w0.152: LED2.12@52.553,12.192 52.586,12.192 53.27,11.508 54.232,11.508 54.678,11.062 54.725,11.062 54.75,11.036 56.5,11.036 57.63,9.906 R7.2
NetLED1_13: LED1.13 LED2.13 R2.2 | length 44.7
  Top Layer w0.152: LED1.13@13.31,12.192 13.553,12.435 14.188,12.435 15.518,13.765 15.56,13.807 15.619,13.81 16.944,13.868 25.73,14.147 cw(c25.785,12.43) 25.794,14.148 25.952,14.147 cw(c26.01,12.243) 26.018,14.148 40.599,14.096 40.615,14.081 42.019,14.081 42.158,13.942 48.336,13.868 LED2.13@50.013,12.192
  Bottom Layer w0.152: LED2.13@50.013,12.192 50.275,11.93 50.995,11.93 51.825,11.1 53.005,11.1 53.007,11.102 54.064,11.102 54.535,10.63 54.869,10.63 55.598,9.9 R2.2
NetLED1_14: LED1.14 U4.15 | length 13.1
  Top Layer w0.152: v1(8.382,2.946) 8.306,3.023 8.306,3.475 8.23,3.551 8.23,10.649 8.397,10.817 8.397,11.5 8.78,11.883 8.806,11.909 9.041,11.918 ccw(c9.017,12.548) 9.127,11.927 LED1.14
  Bottom Layer w0.152: U4.15@8.293,4.761 8.357,3.869 8.357,3.743 v1(8.382,2.946)
NetLED2_6: LED2.6 U5.15 | length 62
  Top Layer w0.152: v1(29.369,3.798) 30.982,3.798 31.843,4.659 33.899,5.286 34.221,5.294 cw(c34.237,4.664) 34.312,5.29 34.686,5.245 ccw(c34.761,5.871) 34.797,5.242 37.032,5.735 ccw(c36.896,6.35) 37.079,5.747 38.904,6.299 43.645,6.299 44.484,7.137 44.956,7.137 44.99,7.172 cw(c45.441,6.731) 46.053,6.582 46.053,6.564 46.053,6.501 46.097,6.457 46.142,6.412 46.205,6.412 46.448,6.654 57.462,6.654 59.124,4.992 64.452,4.992 64.91,4.534 65.15,4.294 65.221,3.164 cw(c64.592,3.124) 65.18,2.896 65.111,2.719 64.309,1.917 63.97,1.917 63.926,1.962 63.881,2.007 63.881,2.06 ccw(c62.789,2.057) 63.013,3.126 ; LED2.6 61.244,2.057 62.474,3.287 62.6,3.287 62.693,3.194 63.011,3.127
  Bottom Layer w0.152: U5.15@19.862,4.572 19.862,5.313 20.798,6.248 24.714,6.248 25.461,5.502 25.461,5.339 25.461,5.286 25.525,5.166 25.542,3.977 25.542,3.915 25.586,3.871 25.89,3.567 26.383,3.567 26.731,3.915 26.751,5.168 26.812,5.276 26.812,5.42 26.812,5.483 27.16,5.831 27.653,5.831 28.001,5.483 28.001,5.381 28.28,5.102 28.301,5.082 28.497,4.978 28.533,4.951 29.201,4.283 v1(29.369,3.798)
NetLED2_8: LED2.8 R1.2 | length 5
  Bottom Layer w0.152: LED2.8@62.713,12.192 62.713,11.821 63.22,11.314 63.274,9.958 cw(c62.644,9.931) 63.274,9.915 63.22,7.836 63.13,7.747 63.067,7.747 R1.2
NetLED2_10: LED2.10 U4.7 | length 50.4
  Bottom Layer w0.152: U4.7@14.58,9.22 14.58,8.682 14.934,8.327 14.934,8.046 16.261,7.29 ccw(c16.739,8.128) 16.981,7.194 18.743,7.651 18.781,7.656 19.254,7.656 19.397,7.799 19.426,7.828 19.467,7.838 19.58,7.868 19.702,7.871 26.535,8.046 27.598,8.448 27.622,8.457 27.974,8.748 28.561,9.335 28.714,10.2 ccw(c28.094,10.31) 28.225,10.926 27.913,10.993 27.839,11.066 27.598,11.945 27.592,11.965 27.592,12.048 27.661,12.117 31.02,13.31 33.121,13.31 33.221,13.41 40.601,13.41 40.702,13.31 46.523,13.31 cw(c47.549,12.217) 48.575,13.31 49.063,13.31 cw(c50.089,12.217) 51.115,13.31 51.603,13.31 cw(c52.629,12.217) 53.655,13.31 55.169,13.31 cw(c55.169,12.217) 56.131,12.735 56.146,12.719 56.191,12.675 57.15,12.675 LED2.10@57.633,12.192
NetLED2_11: LED2.11 U4.6 | length 48.6
  Bottom Layer w0.152: U4.6@13.31,9.22 13.31,8.682 13.698,8.293 13.698,8.012 13.848,8.012 13.956,7.904 14,7.873 16.144,6.888 16.234,6.853 16.239,6.851 ccw(c16.739,8.128) 16.339,6.816 ccw(c16.739,8.128) 17.07,6.797 18.867,7.245 18.904,7.249 19.422,7.249 19.571,7.397 19.6,7.427 19.641,7.437 19.752,7.465 19.875,7.468 26.609,7.639 26.707,7.644 27.782,8.047 28.197,8.397 28.979,9.178 29.12,10.163 ccw(c28.094,10.31) 28.825,11.045 28.457,11.413 28.282,11.715 28.289,11.807 28.378,11.896 30.328,12.633 30.414,12.663 30.62,12.736 33.289,12.903 33.39,13.004 40.433,13.004 40.533,12.903 46.691,12.903 46.749,12.961 cw(c47.549,12.217) 48.349,12.961 48.407,12.903 49.231,12.903 49.289,12.961 cw(c50.089,12.217) 50.889,12.961 50.947,12.903 51.771,12.903 51.829,12.961 cw(c52.629,12.217) 53.429,12.961 53.487,12.903 LED2.11 LED2.11@55.093,12.192
NetLED2_14: LED2.14 U4.5 | length 41.2
  Bottom Layer w0.152: U4.5@12.04,9.22 12.04,8.682 12.428,8.293 12.428,8.012 13.027,7.759 13.087,7.747 13.388,7.747 13.53,7.605 13.68,7.605 13.869,7.416 13.917,7.383 16.055,6.482 16.157,6.446 16.232,6.424 ccw(c16.739,8.128) 16.348,6.393 ccw(c16.739,8.128) 17.152,6.399 18.992,6.839 19.027,6.843 19.591,6.843 19.743,6.995 19.773,7.025 19.815,7.035 19.923,7.061 27.413,7.179 27.475,7.18 27.906,7.611 28.519,8.101 28.575,8.157 28.575,8.2 29.416,9.041 29.416,9.163 29.417,9.181 29.528,10.146 ccw(c28.094,10.31) 29.114,11.33 28.96,11.485 28.979,11.592 29.068,11.681 30.506,12.264 cw(c30.897,11.303) 30.55,12.28 30.69,12.33 33.458,12.497 33.558,12.597 40.264,12.597 40.365,12.497 40.854,12.192 LED2.14@47.473,12.192
NetR1_1: R1.1 U4.14 U5.1 U.26 | length 66.2
  Top Layer w0.152: v1(9.322,5.817) 11.494,7.989 11.494,8.221 13.582,10.308 15.253,10.308 15.44,10.121 17.046,10.121 17.233,10.308 v1(17.233,10.121) 20.329,7.025 20.645,7.025 22.687,4.983 27.613,4.983 27.751,4.846 30.817,4.846 30.954,4.983 31.018,4.983 32.556,6.522 33.707,6.522 34.297,7.112 ; v1(34.491,6.544) 34.406,6.629 34.406,7.003 34.297,7.112 ; v1(60.95,7.504) 54.503,7.504 53.675,8.331 52.226,8.331 51.977,8.58 42.261,8.58 41.224,7.544 40.633,7.544 40.201,7.112 34.297,7.112
  Bottom Layer w0.152: v1(9.322,5.817) 9.322,5.695 9.579,5.438 9.579,5.119 9.555,5.119 9.555,4.04 U4.14@9.5,3.985 ; v1(17.233,10.121) 17.362,10.25 17.387,10.275 17.513,10.275 17.838,10.082 18.42,9.697 U5.1 ; U.26 32.974,5.181 33.619,5.181 34.453,6.015 34.453,6.506 v1(34.491,6.544) ; v1(60.95,7.504) 61.071,7.504 61.314,7.747 R1.1
NetR2_1: R2.1 U3.15 | length 4.8
  Bottom Layer w0.152: U3.15@52.426,9.563 52.426,9.999 53.121,10.695 53.895,10.695 54.576,10.015 54.576,9.921 54.934,9.562 54.934,9.429 55.128,9.236 55.258,9.236 55.598,8.896 R2.1
NetR3_1: R3.1 U3.1 | length 12.1
  Bottom Layer w0.152: U3.1 53.696,3.831 54.469,3.057 54.587,3.175 55.621,3.175 55.992,2.804 56.119,2.804 56.516,3.201 58.149,3.201 58.556,3.608 58.556,4.148 59.665,5.256 R3.1
NetR4_1: R4.1 U3.2 | length 4.5
  Bottom Layer w0.152: U3.2 52.426,4.907 53.737,6.219 55.47,6.219 R4.1
NetR5_1: R5.1 U3.3 | length 9.6
  Bottom Layer w0.152: U3.3 51.156,4.797 51.329,4.97 51.648,4.97 54.044,7.366 56.617,7.366 56.617,7.364 56.997,6.984 56.997,6.553 57.161,6.388 57.161,5.413 R5.1@57.379,5.195 ; R5.1@57.415,4.991 R5.1@57.504,4.902
NetR6_1: R6.1 U3.4 | length 9.8
  Bottom Layer w0.152: R6.1 45.187,3.372 45.481,3.666 45.481,5.372 45.611,5.502 47.851,5.502 47.938,5.414 47.981,5.372 48.021,4.197 48.021,3.585 48.369,3.237 48.862,3.237 49.393,3.768 49.712,3.768 49.886,3.942 U3.4
NetR7_1: R7.1 U3.5 | length 11.1
  Bottom Layer w0.152: U3.5 48.616,4.797 48.789,4.97 49.108,4.97 51.87,7.732 53.722,7.732 53.762,7.772 55.614,7.772 56.744,8.902 R7.1
NetR8_1: R8.1 U3.6 | length 25.8
  Bottom Layer w0.152: U3.6 47.346,4.228 ccw(c48.318,2.778) 46.581,2.614 cw(c46.429,2.6) 46.566,2.534 ccw(c47.549,2.057) 47.961,1.046 cw(c48.017,0.904) 48.041,1.055 ccw(c48.318,2.778) 49.126,1.231 ccw(c49.054,1.365) 49.181,1.45 cw(c50.089,2.057) 49.94,3.139 ccw(c49.918,3.29) 49.943,3.14 49.991,3.148 50.018,3.175 50.024,3.175 52.954,3.175 52.999,3.13 53.009,3.12 53.031,3.098 cw(c52.629,2.083) 53.644,2.485 53.666,2.463 53.823,2.307 53.823,1.757 54.64,0.94 58.191,0.94 58.963,1.711 58.963,3.98 59.84,4.857 R8.1@63.117,4.857
NetR9_1: R9.1 U3.7 | length 22.9
  Bottom Layer w0.152: U3.7 46.076,3.494 45.972,2.319 ccw(c47.673,2.169) 47.812,0.468 48.615,0.533 60.579,0.533 61.265,1.219 61.265,1.548 61.339,1.938 ccw(c59.945,2.203) 61.28,2.682 ccw(c59.945,2.203) 61.268,2.714 60.858,3.124 60.599,3.124 cw(c60.601,3.277) 60.56,3.13 ccw(c60.249,2.083) 60.252,3.175 60.209,3.218 59.838,3.589 59.838,3.715 60.311,4.189 R9.1
NetR13_1: R13.1 U1.A1 | length 1.7
  Top Layer w0.152: U1.A1 26.572,7.811 R13.1
NetSW3_B1: SW3.B1 SW3.B2 SW3.B3 U.2 | length 38.3
  Top Layer w0.152: v1(38.243,9.181) 38.644,8.759 ccw(c39.119,9.173) 39.73,9.019 39.794,9.273 39.99,9.468 40.018,9.496 41.099,9.906 51.046,9.906 51.397,10.257 51.44,10.299 51.5,10.301 51.862,10.312 51.866,10.312 56.795,10.312 56.846,10.262 61.103,10.262 61.341,10.5 61.341,10.506 61.43,10.595 61.48,10.599 64.347,10.676 ; 64.348,10.676 64.641,10.676 64.65,10.667 65.076,10.667 v1(65.162,10.582)
  Bottom Layer w0.152: U.2@34.875,11.167 34.875,10.492 35.143,9.275 35.23,9.187 37.261,9.144 ccw(c37.275,9.774) 37.275,9.144 37.332,9.087 37.376,9.042 37.502,9.042 v1(38.243,9.181) ; v1(65.162,10.582) 65.842,10.582 66.459,11.199 67.601,11.199 68.35,11.948 SW3.B2@68.35,13.299
NetSW4_B1: SW4.B1 SW4.B2 SW4.B3 U.32 | length 59.1
  Top Layer w0.152: v1(30.897,11.303) 30.813,11.387 30.368,11.387 30.292,11.463 27.975,11.463 27.456,11.463 26.676,10.683 26.637,10.644 26.637,10.518 26.668,10.477 27.126,9.939 ccw(c27.854,10.218) 27.507,9.52 ccw(c27.854,10.218) 27.541,9.504 27.574,9.504 27.583,9.504 29.591,9.736 29.644,9.742 29.682,9.78 30.087,10.185 31.534,10.185 31.724,9.995 31.823,9.995 31.841,9.996 33.734,10.215 cw(c34.17,6.469) 33.738,10.216 cw(c34.17,6.469) 34.476,10.228 35.509,10.145 35.598,10.056 36.55,8.975 ccw(c37.275,9.612) 36.853,8.744 37.103,8.532 37.109,8.526 37.156,8.479 37.296,8.331 ccw(c38.049,9.042) 37.562,8.128 37.628,8.092 37.662,8.074 38.183,8.074 ccw(c39.119,9.173) 39.595,7.81 39.62,7.81 40.325,7.81 41.502,8.987 53.594,8.987 54.215,8.366 54.258,8.323 54.318,8.321 54.322,8.321 54.379,8.308 54.4,8.304 54.437,8.297 54.448,8.285 54.537,8.285 54.541,8.285 54.543,8.285 58.948,8.186 63.899,8.258 64.004,8.301 64.005,8.302 64.592,8.89 v1(65.126,8.89)
  Bottom Layer w0.152: v1(30.897,11.303) 30.897,10.77 30.968,10.699 31.95,9.717 U.32@32.625,9.717 ; v1(65.126,8.89) 68.722,8.89 71.031,11.199 72.173,11.199 72.668,11.694 72.795,11.694 72.973,11.872 SW4.B2
NetU2_1: U2.1 U.1 | length 3.1
  Top Layer w0.152: U2.1 33.51,8.792 34.132,9.414 34.281,9.414 v1(34.366,9.5)
  Bottom Layer w0.152: U.1@34.075,11.167 34.075,9.912 34.366,9.621 v1(34.366,9.5)
NetU2_3: U2.3 U.28 | length 9.2
  Top Layer w0.152: v1(29.791,6.73) 29.427,7.293 29.127,7.895 29.127,7.944 29.127,8.017 29.729,8.683 cw(c30.196,8.26) 29.805,8.754 30.423,9.372 31.197,9.372 31.39,9.179 31.39,9.112 31.71,8.792 U2.3
  Bottom Layer w0.152: v1(29.791,6.73) 29.916,6.162 29.924,6.132 30.013,6.042 30.065,6.042 30.286,6.042 30.637,5.691 30.669,5.659 30.711,5.617 30.806,5.617 31.261,5.706 31.261,5.738 31.948,6.425 32.619,6.425 U.28
NetU2_4: U2.4 U.27 | length 7.2
  Top Layer w0.152: v1(30.006,7.59) 30.23,7.979 30.423,8.172 30.655,8.337 30.744,8.426 30.789,8.471 30.81,8.492 U2.4
  Bottom Layer w0.152: v1(30.006,7.59) 29.504,7.293 29.442,7.272 29.403,7.233 29.161,6.991 29.161,6.561 29.529,5.924 29.547,5.901 29.56,5.886 29.81,5.636 30.118,5.636 30.575,5.179 30.607,5.147 30.651,5.138 30.806,5.104 31.213,5.104 31.914,5.572 32.136,5.638 U.27@32.625,5.717
NetU3_11: U3.11 U.14 | length 13.5
  Bottom Layer w0.152: U.14@41.125,5.717 41.8,5.717 42.86,5.904 42.875,5.918 42.91,5.918 44.273,7.281 44.318,7.326 45.232,7.326 cw(c45.441,6.731) 45.649,7.326 46.658,7.326 46.826,7.493 48.216,7.493 49.21,8.487 49.21,10.055 48.862,10.403 48.369,10.403 47.838,9.872 47.519,9.872 47.346,9.699 U3.11
NetU3_12: U3.12 U.11 | length 8.5
  Bottom Layer w0.152: U.11@41.125,8.117 44.006,8.117 44.391,7.732 45.172,7.732 cw(c45.441,6.731) 45.709,7.732 46.49,7.732 46.875,8.117 47.57,8.117 48.123,8.67 48.442,8.67 48.616,8.843 U3.12
NetU3_13: U3.13 U.10 | length 12.1
  Bottom Layer w0.152: U.10@41.125,8.917 41.891,8.917 42.284,8.523 44.175,8.523 44.559,8.139 45.052,8.139 45.274,8.164 cw(c45.441,6.731) 45.607,8.164 45.829,8.139 46.322,8.139 46.711,8.527 46.711,10.015 47.099,10.403 47.795,10.403 48.201,10.81 49.03,10.81 49.616,10.224 49.616,10.18 49.886,9.911 U3.13
NetU3_14: U3.14 U.13 | length 11.8
  Top Layer w0.152: v1(43.247,7.146) 43.263,7.163 43.714,7.163 43.776,7.163 44.315,7.544 45.217,7.743 cw(c45.441,6.731) 45.556,7.761 49.805,7.284 v1(50.013,7.285) v1(50.013,7.285)
  Bottom Layer w0.152: U.13@41.125,6.517 42.655,6.517 43.247,7.109 v1(43.247,7.146) ; v1(50.013,7.285) 50.013,7.366 50.621,7.975 50.621,8.198 51.156,8.733 U3.14
NetU4_9: U4.9 U5.14 | length 6.1
  Bottom Layer w0.152: U4.9@15.85,4.318 15.925,4.242 16.941,4.242 18.27,3.567 18.763,3.567 18.834,3.638 19.137,3.638 19.277,3.615 19.394,3.596 19.54,3.567 20.033,3.567 20.175,3.708 20.967,3.869 21.057,3.958 U5.14@21.057,4.496
NetU4_11: U4.11 U5.11 U.25 | length 30
  Top Layer w0.152: v1(30.198,3.139) 31.098,3.139 31.545,2.692 32.263,2.692 32.556,2.399 34.23,2.399 34.423,2.592 34.423,4.266 v1(34.237,4.664)
  Bottom Layer w0.152: U4.11 13.437,3.979 13.61,3.806 13.929,3.806 14.575,3.16 20.896,3.16 21.651,3.915 21.651,5.402 22.08,5.831 24.272,5.831 24.867,5.237 U5.11 24.867,4.059 25.135,3.791 25.135,3.747 25.722,3.16 27.019,3.16 27.419,3.561 28.704,3.561 29.125,3.139 v1(30.198,3.139) ; U.25 32.974,4.393 33.672,4.393 33.962,4.683 34.209,4.683 v1(34.237,4.664)
NetU4_12: U4.12 U5.12 U.12 | length 55
  Top Layer w0.152: v1(12.725,5.994) 21.721,4.756 21.771,4.749 21.808,4.713 22.35,4.171 27.277,4.171 27.548,3.899 27.698,3.899 27.964,3.633 27.974,3.623 27.988,3.606 v1(28.443,2.93) v1(28.443,2.93) ; v1(39.602,5.633) 41.334,5.867 41.797,5.867 41.833,5.841 v1(43.028,4.953)